# EAGLE board twomics_sw_led (EAGLE 7.7.0)
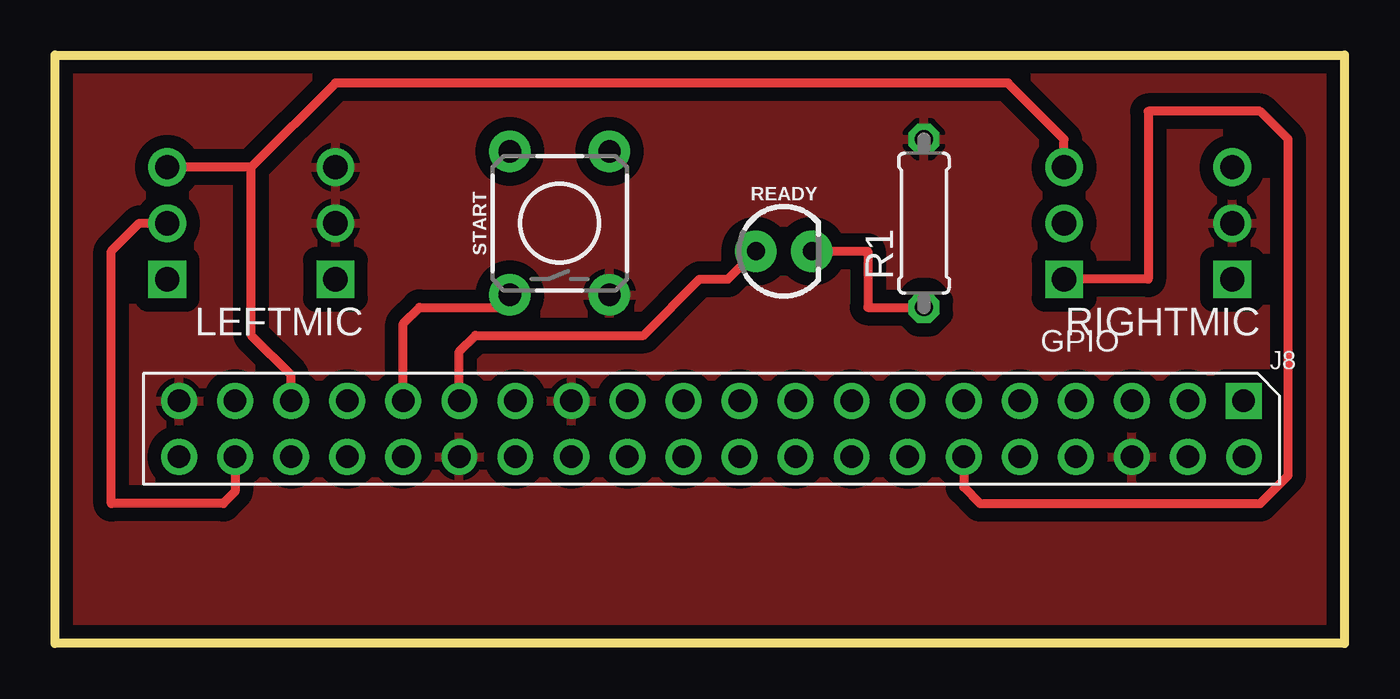
[diagram p0: board, top side]
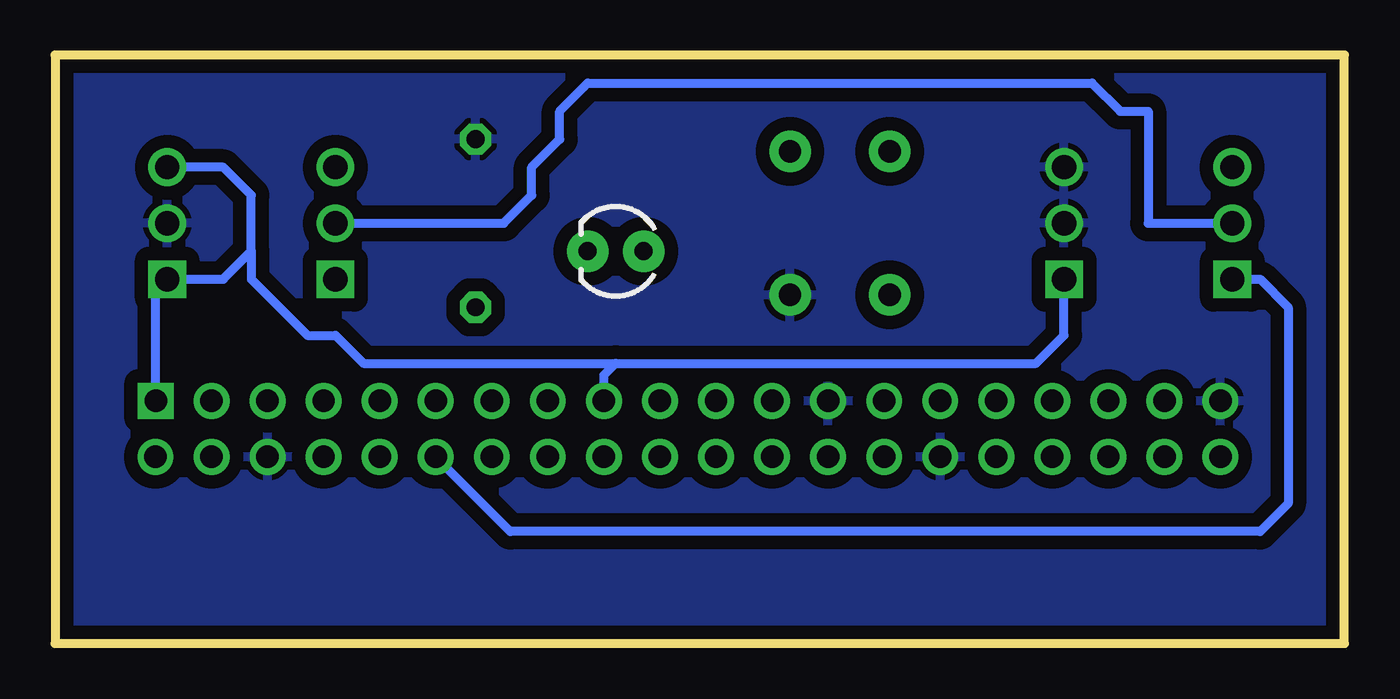
[diagram p1: board, bottom side, seen from below]

Size 58.42 x 26.67 mm. Coordinates in mm from the lower left corner, seen from the top.
Outline: 0,26.67 58.42,26.67 58.42,0 0,0 0,26.67
Copper layers (1*16): Top 0.035mm / dielectric 1.5mm / Bottom 0.035mm
Design rules "SparkFun": minimum track width 8mil, minimum drill 20mil, track to track 8mil, track to pad 8mil, pad to pad 8mil, via to via 8mil, smd to smd 8mil, copper to edge 8mil, drill to drill 8mil, minimum pad ring 12mil, minimum via ring 10mil, stop-mask expansion 4mil, vias tented up to drill 20mil, thermal gap 10mil

## Footprints (pad centres in the part's own frame; a part is rotated, then mirrored left to right if it is on the bottom)
PTH = drill 1.1: GND -3.81,0; L/R -3.81,-2.54; SD 3.81,0; WS 3.81,-2.54 | drill 1.1 square: SCK 3.81,2.54; V+ -3.81,2.54
40_PIN = drill 1.016 square: P$1 2.02,1.7 | drill 1.016: P$2 2.007,4.242; P$3 4.547,1.702; P$4 4.547,4.242; P$5 7.087,1.702; P$6 7.087,4.242; P$7 9.627,1.702; P$8 9.627,4.242; P$9 12.167,1.702; P$10 12.167,4.242; P$11 14.707,1.702; P$12 14.707,4.242; P$13 17.247,1.702; P$14 17.247,4.242; P$15 19.787,1.702; P$16 19.787,4.242; P$17 22.327,1.702; P$18 22.327,4.242; P$19 24.867,1.702; P$20 24.867,4.242; P$21 27.407,1.702; P$22 27.407,4.242; P$23 29.947,1.702; P$24 29.947,4.242; P$25 32.487,1.702; P$26 32.487,4.242; P$27 35.027,1.702; P$28 35.027,4.242; P$29 37.567,1.702; P$30 37.567,4.242; P$31 40.107,1.702; P$32 40.107,4.242; P$33 42.647,1.702; P$34 42.647,4.242; P$35 45.187,1.702; P$36 45.187,4.242; P$37 47.727,1.702; P$38 47.727,4.242; P$39 50.267,1.702; P$40 50.267,4.242
0207/7 = drill 0.813 octagon: 1 -3.81,0; 2 3.81,0
LED_3MM = drill 0.813 pad 1.88: A -1.27,0; K 1.27,0
TACTILE_SWITCH_PTH_6.0MM = drill 1.016 pad 1.88: 1 -3.251,2.261; 2 3.251,2.261; 3 -3.251,-2.261; 4 3.251,-2.261

## Placement (x,y rotation side)
LEFTMIC  EMMIC-ICS43432  [PTH]  8.89,19.05 180 top
PCB1  RPI3_40_PIN  [40_PIN]  55.88,12.7 180 top
R1  220  [0207/7]  39.37,19.05 90 top
READY  [LED_3MM]  33.02,17.78 0 top
RIGHTMIC  EMMIC-ICS43432  [PTH]  49.53,19.05 180 top
START  [TACTILE_SWITCH_PTH_6.0MM]  22.86,19.05 90 top

## Library data of the parts
LEFTMIC RIGHTMIC = invensense
PCB1 = e14_Rpi3_RevA
R1 = resistor
READY = SparkFun-LED; PROD_ID: DIO-08794
START = SparkFun-Switches; PROD_ID: SWCH-08441; SF_SKU: COM-00097

## Nets
3V3: LEFTMIC.V+ PCB1.P$1 PCB1.P$17 RIGHTMIC.L/R RIGHTMIC.V+
GND: LEFTMIC.GND LEFTMIC.L/R PCB1.P$6 PCB1.P$25 PCB1.P$30 PCB1.P$39 R1.2 RIGHTMIC.GND START.3
N$1: R1.1 READY.K
READY: PCB1.P$29 READY.A
SCK: LEFTMIC.SCK PCB1.P$12 RIGHTMIC.SCK
SD: LEFTMIC.SD PCB1.P$38 RIGHTMIC.SD
START: PCB1.P$31 START.1
WS: LEFTMIC.WS PCB1.P$35 RIGHTMIC.WS

## Tracks (layer width: path | path; a pad name or v marks a point on that pad's centre or on a via)
3V3
  Bottom 0.406: PCB1.P$17 33.55,12.17 33.02,12.7 | 33.02,12.7 13.97,12.7 12.7,13.97 LEFTMIC.V+ | 49.53,17.78 50.8,16.51 RIGHTMIC.V+ 53.86,15.99 PCB1.P$1 | 49.53,17.78 49.53,20.32 50.8,21.59 RIGHTMIC.L/R | 49.53,17.78 49.53,16.51 46.99,13.97 45.72,13.97 44.45,12.7 33.02,12.7
GND
  pour Top (isolate 0.61): 0,0 0,26.67 58.42,26.67 58.42,0
  pour Bottom (isolate 0.61): 0,0 0,26.67 58.42,26.67 58.42,0
N$1
  Top 0.406: READY.K 36.83,17.78 36.83,15.24 R1.1
READY
  Top 0.406: PCB1.P$29 18.31,13.23 19.05,13.97 26.67,13.97 29.21,16.51 30.48,16.51 READY.A
SCK
  Top 0.406: PCB1.P$12 41.17,7.09 41.91,6.35 54.61,6.35 55.88,7.62 55.88,22.86 54.61,24.13 49.53,24.13 49.53,16.51 RIGHTMIC.SCK
  Bottom 0.406: LEFTMIC.SCK 3.81,16.51 2.54,15.24 2.54,6.35 3.81,5.08 37.8,5.08 PCB1.P$12
SD
  Top 0.406: PCB1.P$38 8.15,6.88 7.62,6.35 2.54,6.35 2.54,17.78 3.81,19.05 LEFTMIC.SD
  Bottom 0.406: RIGHTMIC.SD 38.1,19.05 36.83,20.32 36.83,21.59 35.56,22.86 35.56,24.13 34.29,25.4 11.43,25.4 10.16,24.13 8.89,24.13 8.89,19.05 LEFTMIC.SD
START
  Top 0.406: PCB1.P$31 15.77,14.5 16.51,15.24 20.04,15.24 START.1
WS
  Top 0.406: PCB1.P$35 10.69,12.17 8.89,13.97 8.89,21.59 | 8.89,21.59 LEFTMIC.WS | RIGHTMIC.WS 45.72,22.86 43.18,25.4 12.7,25.4 8.89,21.59